# EAGLE board board (EAGLE 4.16)
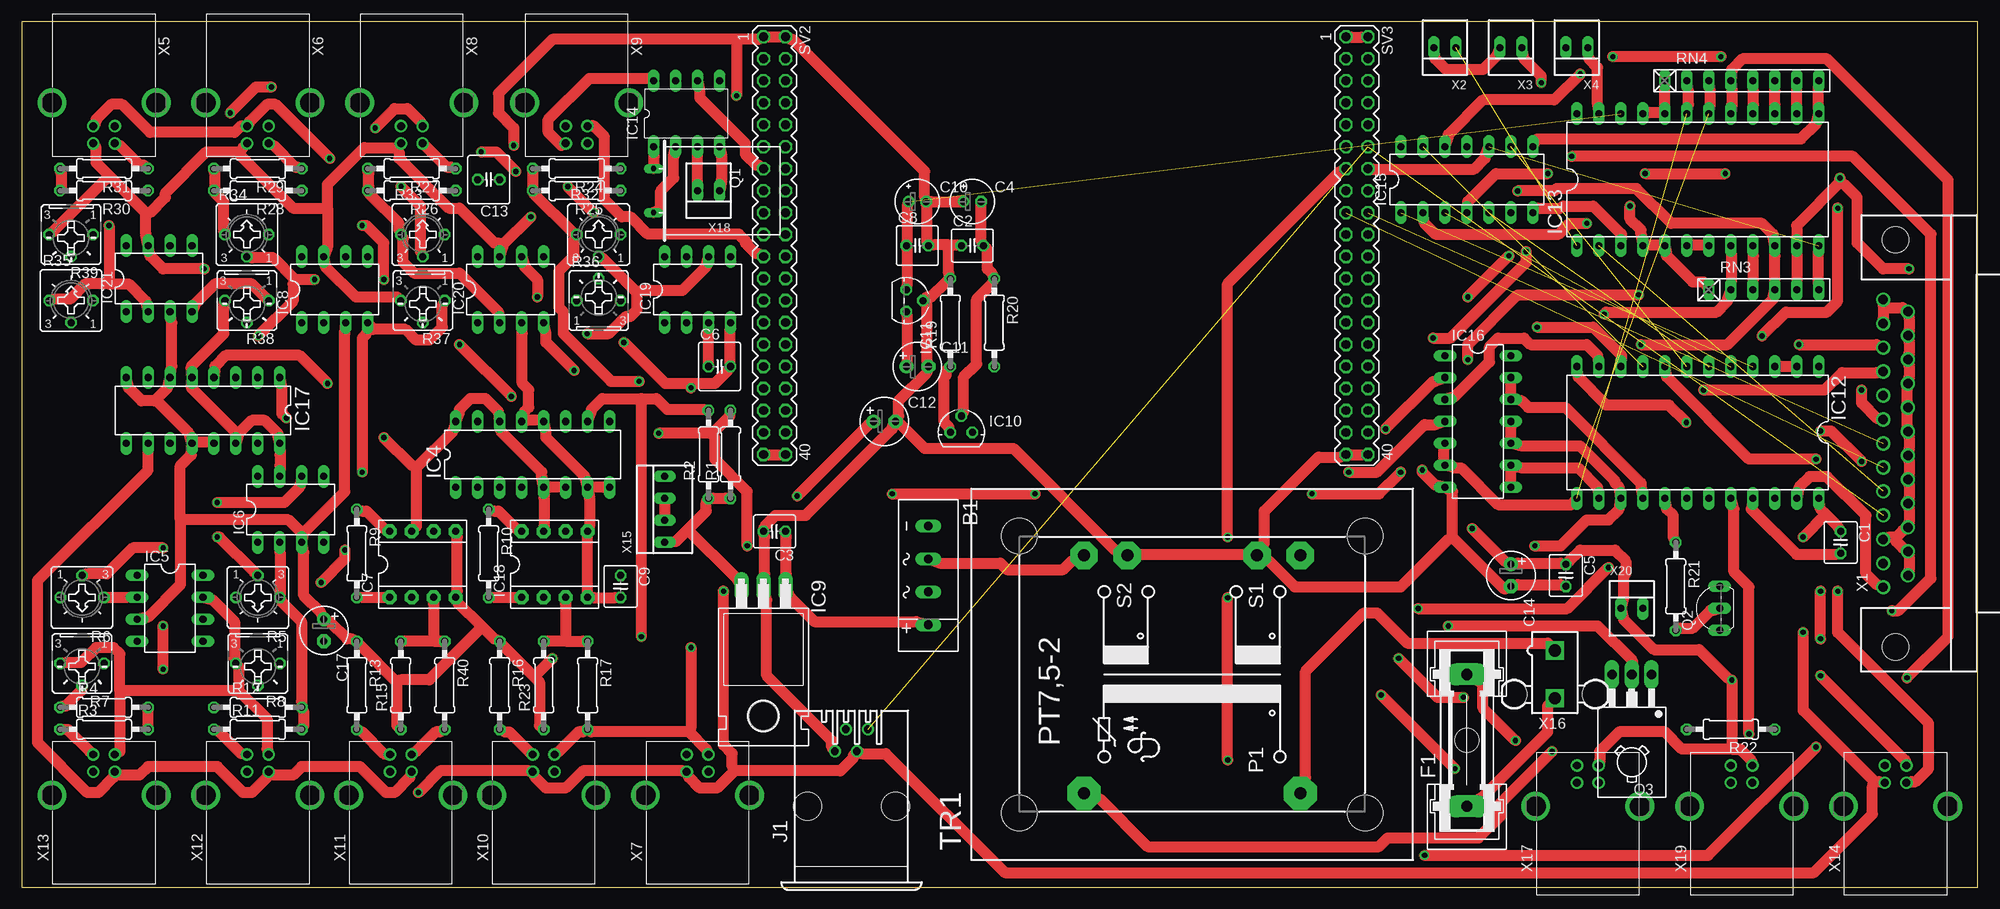
[diagram p0: board, top side]
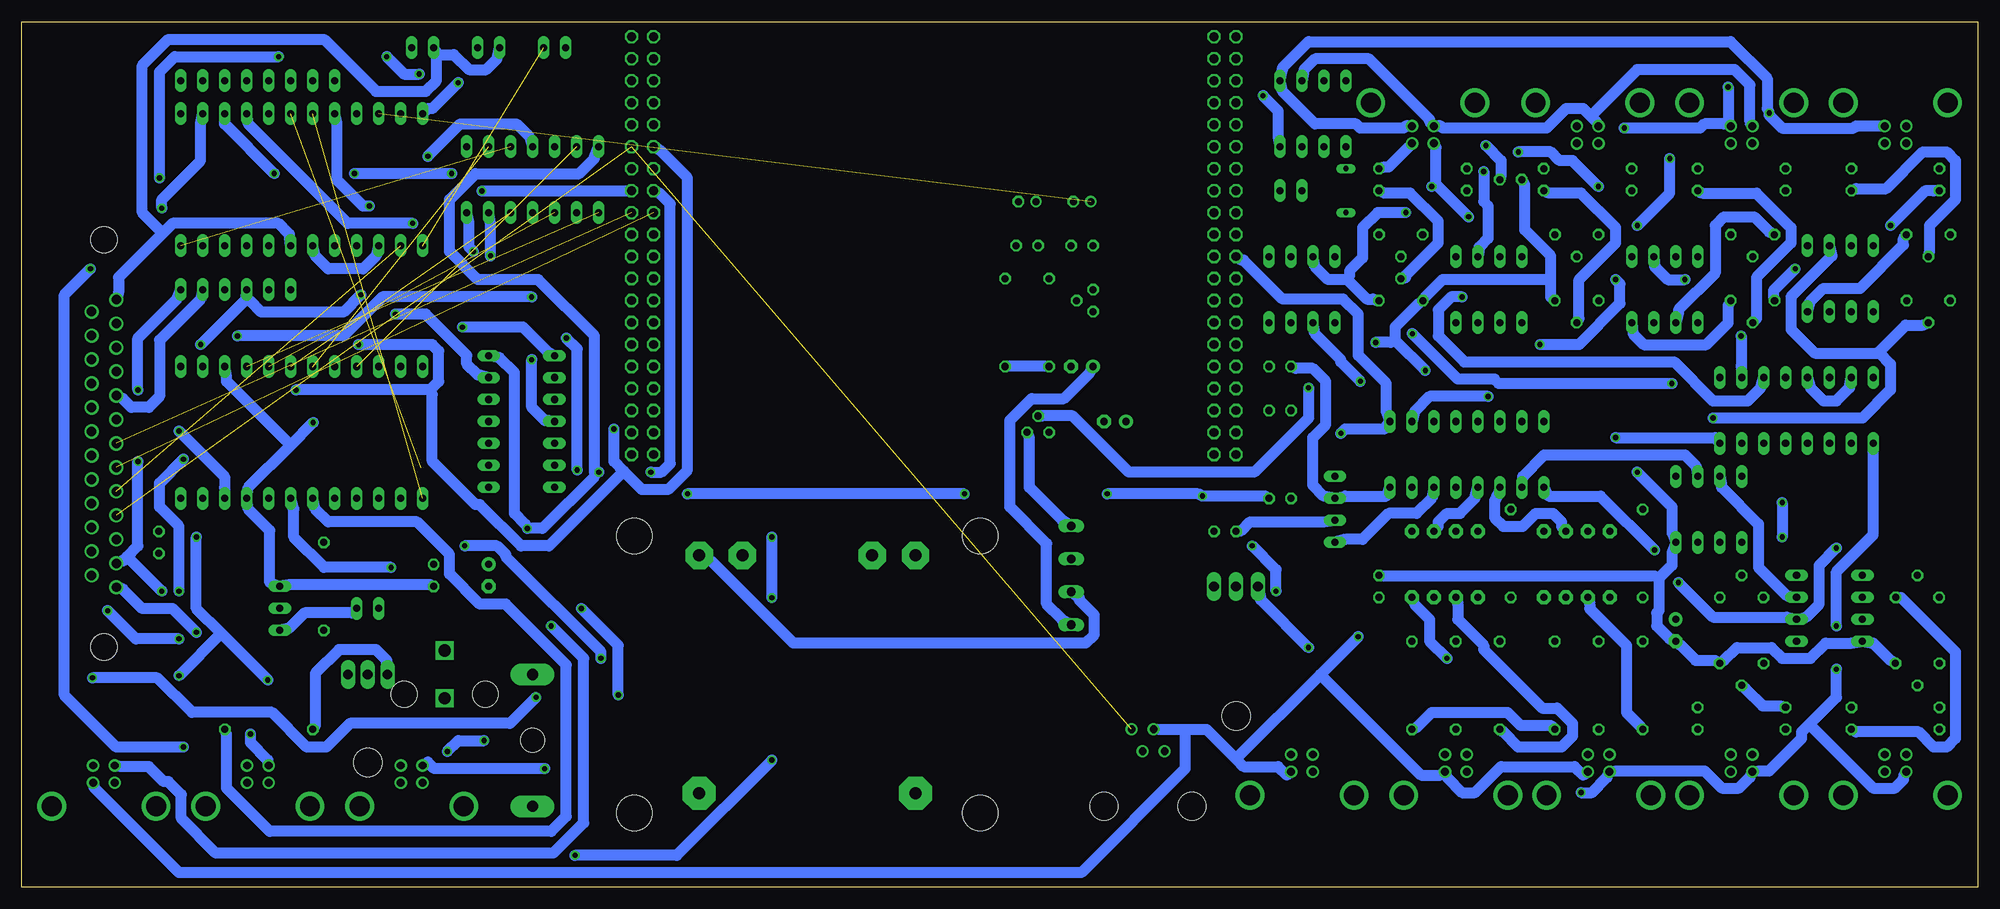
[diagram p1: board, bottom side, seen from below]

Size 226.04 x 100 mm. Coordinates in mm from the lower left corner, seen from the top.
Outline: 0,0 226.04,0 226.04,100 0,100 0,0
Copper layers (1*16): Top 0.035mm / dielectric 1.5mm / Bottom 0.035mm
Design rules "design rules": minimum track width 50mil, minimum drill 24mil, track to track 20mil, track to pad 20mil, pad to pad 20mil, via to via 20mil, smd to smd 20mil, copper to edge 40mil, drill to drill 8mil, minimum pad ring 10mil, minimum via ring 8mil, stop-mask expansion 4mil, vias tented up to drill 0mil, thermal gap 10mil

## Footprints (pad centres in the part's own frame; a part is rotated, then mirrored left to right if it is on the bottom)
2KBP = drill 1.016 long: + 5.715,0; - -5.715,0; AC1 -1.905,0; AC2 1.905,0
C025-040X050 = drill 0.813 octagon: 1 -1.27,0; 2 1.27,0
E2-5 = drill 0.813 pad 1.27 round: + -1.016,0 | drill 0.813 pad 1.27 octagon: - 1.016,0
C025-060X050 = drill 0.813 octagon: 1 -1.27,0; 2 1.27,0
C025-050X050 = drill 0.813 octagon: 1 -1.27,0; 2 1.27,0
E2,5-6 = drill 0.813 pad 1.6 round: + -1.27,0 | drill 0.813 pad 1.6 octagon: - 1.27,0
GSH15 = drill 1.321 pad 2.54 long: 1 -7.62,0; 2 7.62,0 | hole 2.794: 0,0
DIL16 = drill 0.813 long: 1 -8.89,-3.81; 2 -6.35,-3.81; 3 -3.81,-3.81; 4 -1.27,-3.81; 5 1.27,-3.81; 6 3.81,-3.81; 7 6.35,-3.81; 8 8.89,-3.81; 9 8.89,3.81; 10 6.35,3.81; 11 3.81,3.81; 12 1.27,3.81; 13 -1.27,3.81; 14 -3.81,3.81; 15 -6.35,3.81; 16 -8.89,3.81
DIL08 = drill 0.813 long: 1 -3.81,-3.81; 2 -1.27,-3.81; 3 1.27,-3.81; 4 3.81,-3.81; 5 3.81,3.81; 6 1.27,3.81; 7 -1.27,3.81; 8 -3.81,3.81
DIL08' = drill 0.813 pad 1.6 octagon: 1 -3.81,-3.81; 2 -1.27,-3.81; 3 1.27,-3.81; 4 3.81,-3.81; 5 3.81,3.81; 6 1.27,3.81; 7 -1.27,3.81; 8 -3.81,3.81
TO220H = drill 1.118 long: 1 -2.54,-10.16; 2 0,-10.16; 3 2.54,-10.16 | hole 3.302: 0,4.826
337L = drill 0.813 octagon: ADJ -1.27,0; IN 1.27,0; OUT 0,1.905
TO92 = drill 0.813 octagon: 1 -1.27,0; 2 0,1.905; 3 1.27,0
DIL24-6 = drill 0.813 long: 1 -13.97,-7.62; 2 -11.43,-7.62; 3 -8.89,-7.62; 4 -6.35,-7.62; 5 -3.81,-7.62; 6 -1.27,-7.62; 7 1.27,-7.62; 8 3.81,-7.62; 9 6.35,-7.62; 10 8.89,-7.62; 11 11.43,-7.62; 12 13.97,-7.62; 13 13.97,7.62; 14 11.43,7.62; 15 8.89,7.62; 16 6.35,7.62; 17 3.81,7.62; 18 1.27,7.62; 19 -1.27,7.62; 20 -3.81,7.62; 21 -6.35,7.62; 22 -8.89,7.62; 23 -11.43,7.62; 24 -13.97,7.62
DS1307 = drill 0.8 long: 1 -8.89,-5.08; 2 -6.35,-5.08; 3 -3.81,-5.08; 4 -1.27,-5.08; 5 -1.27,2.54; 6 -3.81,2.54; 7 -6.35,2.54; 8 -8.89,2.54
DIL14 = drill 0.813 long: 1 -7.62,-3.81; 2 -5.08,-3.81; 3 -2.54,-3.81; 4 0,-3.81; 5 2.54,-3.81; 6 5.08,-3.81; 7 7.62,-3.81; 8 7.62,3.81; 9 5.08,3.81; 10 2.54,3.81; 11 0,3.81; 12 -2.54,3.81; 13 -5.08,3.81; 14 -7.62,3.81
520242-2 = drill 0.889 round: 1 -1.905,6.35; 2 -0.635,8.89; 3 0.635,6.35; 4 1.905,8.89 | hole 3.251: -5.08,0; 5.08,0
Q = drill 0.61 long: 1 -2.54,-7.62; 2 2.54,-7.62
TO92-EBC = drill 0.813 long: B 0,-1.27; C -2.54,-1.27; E 2.54,-1.27
TO126 = drill 1.118 long: 1 -2.286,-5.08; 2 0,-5.08; 3 2.286,-5.08 | hole 3.302: 0,5.08
0207/10 = drill 0.813 octagon: 1 -5.08,0; 2 5.08,0
CT6 = drill 0.813 octagon: A 2.515,0; E -2.515,0; S 0,-2.54
B25P = drill 0.813 octagon: A -2.54,0; E 2.54,0; S 0,2.54
RN-6 = drill 0.813 long: 1 -6.35,0; 2 -3.81,0; 3 -1.27,0; 4 1.27,0; 5 3.81,0; 6 6.35,0
RN-8 = drill 0.813 long: 1 -8.89,0; 2 -6.35,0; 3 -3.81,0; 4 -1.27,0; 5 1.27,0; 6 3.81,0; 7 6.35,0; 8 8.89,0
MA20-2 = drill 1.016 octagon: 1 -24.13,-1.27; 2 -24.13,1.27; 3 -21.59,-1.27; 4 -21.59,1.27; 5 -19.05,-1.27; 6 -19.05,1.27; 7 -16.51,-1.27; 8 -16.51,1.27; 9 -13.97,-1.27; 10 -13.97,1.27; 11 -11.43,-1.27; 12 -11.43,1.27; 13 -8.89,-1.27; 14 -8.89,1.27; 15 -6.35,-1.27; 16 -6.35,1.27; 17 -3.81,-1.27; 18 -3.81,1.27; 19 -1.27,-1.27; 20 -1.27,1.27; 21 1.27,-1.27; 22 1.27,1.27; 23 3.81,-1.27; 24 3.81,1.27; 25 6.35,-1.27; 26 6.35,1.27; 27 8.89,-1.27; 28 8.89,1.27; 29 11.43,-1.27; 30 11.43,1.27; 31 13.97,-1.27; 32 13.97,1.27; 33 16.51,-1.27; 34 16.51,1.27; 35 19.05,-1.27; 36 19.05,1.27; 37 21.59,-1.27; 38 21.59,1.27; 39 24.13,-1.27; 40 24.13,1.27
PT07,5-2 = drill 1.397 pad 3.81 octagon: 1 -13.741,12.497; 2 -13.741,-12.497 | drill 1.397 pad 3.175 octagon: 3 13.741,-12.497; 4 13.741,-7.493; 5 13.741,7.493; 6 13.741,12.497 | hole 4.115: -16.002,-19.99; 16.002,-19.99; 16.002,19.99; -16.002,19.99
H3M25RA = drill 1.092 round: 1 -16.612,1.422; 2 -13.843,1.422; 3 -11.074,1.422; 4 -8.306,1.422; 5 -5.537,1.422; 6 -2.769,1.422; 7 0,1.422; 8 2.769,1.422; 9 5.537,1.422; 10 8.306,1.422; 11 11.074,1.422; 12 13.843,1.422; 13 16.612,1.422; 14 -15.227,-1.422; 15 -12.459,-1.422; 16 -9.69,-1.422; 17 -6.921,-1.422; 18 -4.153,-1.422; 19 -1.384,-1.422; 20 1.384,-1.422; 21 4.153,-1.422; 22 6.921,-1.422; 23 9.69,-1.422; 24 12.459,-1.422; 25 15.227,-1.422 | hole 3.048: -23.52,0; 23.52,0
22-23-2021 = drill 0.813 long: 1 -1.27,0; 2 1.27,0
85-32004-10X = drill 0.92 pad 1.27 round: 1 4.71,-1.25; 2 4.71,1.25; 3 2.71,1.25; 4 2.71,-1.25 | drill 2.3 pad 3 round: M1 0,6.02; M2 0,-6.02
22-23-2041 = drill 0.813 long: 1 -3.81,0; 2 -1.27,0; 3 1.27,0; 4 3.81,0
5566-2 = drill 1.4 square: 1 0,-2.75; 2 0,2.75 | hole 3: 4.7,2.29; -4.7,2.29

## Placement (x,y rotation side)
B1  [2KBP]  104.77,36.03 270 top
C1  [C025-040X050]  210.18,39.84 270 top
C2  [C025-040X050]  109.85,74.13 0 top
C3  [C025-040X050]  86.99,41.11 180 top
C4  [E2-5]  109.85,79.21 0 top
C5  [C025-040X050]  178.43,36.03 270 top
C6  [C025-060X050]  80.64,60.16 0 top
C8  [C025-050X050]  103.5,74.13 0 top
C9  [C025-040X050]  69.21,34.76 270 top
C10  [E2-5]  103.5,79.21 0 top
C11  [E2,5-6]  103.5,60.16 0 top
C12  [E2,5-6]  99.69,53.81 0 top
C13  [C025-060X050]  53.97,81.75 180 top
C14  [E2,5-6]  172.08,36.03 270 top
C17  [E2,5-6]  34.92,29.68 270 top
F1  [GSH15]  167,16.98 90 top
IC4  PCF8591P  [DIL16]  59.05,50 0 top
IC5  LF351N  [DIL08]  17.14,32.22 270 top
IC6  LF351N  [DIL08]  31.11,43.65 0 top
IC7  INA141P  [DIL08']  46.35,37.3 0 top
IC8  LF351N  [DIL08]  36.19,69.05 0 top
IC9  7805T  [TO220H]  85.72,24.6 180 top
IC10  [337L]  108.58,52.54 0 top
IC11  7812L  [TO92]  102.23,67.78 270 top
IC12  PCA9555N  [DIL24-6]  193.67,52.54 180 top
IC13  MX7225KN  [DIL24-6]  193.67,81.75 0 top
IC14  DS1307  [DS1307]  81.91,90.64 0 top
IC15  74LS07N  [DIL14]  167,81.75 0 top
IC16  74LS07N  [DIL14]  168.27,53.81 270 top
IC17  PCF8591P  [DIL16]  20.95,55.08 180 top
IC18  INA141P  [DIL08']  61.59,37.3 0 top
IC19  LF351N  [DIL08]  78.1,69.05 0 top
IC20  LF351N  [DIL08]  56.51,69.05 0 top
IC21  LF351N  [DIL08]  15.87,70.32 0 top
J1  [520242-2]  95.88,9.36 0 top
Q1  [Q]  80.64,80.48 270 top
Q2  BC548  [TO92-EBC]  194.94,32.22 90 top
Q3  BD236  [TO126]  186.05,19.52 180 top
R1  [0207/10]  81.91,50 90 top
R2  [0207/10]  79.37,50 90 top
R3  [0207/10]  9.52,18.25 0 top
R4  [0207/10]  9.52,20.79 0 top
R5  [CT6]  27.3,33.49 180 top
R6  [CT6]  6.98,33.49 180 top
R7  [B25P]  6.98,25.87 180 top
R8  [B25P]  27.3,25.87 180 top
R9  [0207/10]  38.73,38.57 270 top
R10  [0207/10]  53.97,38.57 270 top
R11  [0207/10]  27.3,18.25 0 top
R12  [0207/10]  27.3,20.79 0 top
R13  [0207/10]  38.73,23.33 270 top
R15  [0207/10]  43.81,23.33 90 top
R16  [0207/10]  55.24,23.33 270 top
R17  [0207/10]  65.4,23.33 270 top
R19  [0207/10]  107.31,65.24 90 top
R20  [0207/10]  112.39,65.24 270 top
R21  [0207/10]  191.13,34.76 270 top
R22  [0207/10]  197.48,18.25 180 top
R23  [0207/10]  60.32,23.33 90 top
R24  [0207/10]  64.13,83.02 180 top
R25  [0207/10]  64.13,80.48 180 top
R26  [0207/10]  45.08,80.48 180 top
R27  [0207/10]  45.08,83.02 180 top
R28  [0207/10]  27.3,80.48 180 top
R29  [0207/10]  27.3,83.02 180 top
R30  [0207/10]  9.52,80.48 180 top
R31  [0207/10]  9.52,83.02 180 top
R32  [CT6]  66.67,75.4 0 top
R33  [CT6]  46.35,75.4 0 top
R34  [CT6]  26.03,75.4 0 top
R35  [CT6]  5.71,67.78 0 top
R36  [B25P]  66.67,67.78 0 top
R37  [B25P]  46.35,67.78 180 top
R38  [B25P]  26.03,67.78 180 top
R39  [B25P]  5.71,75.4 180 top
R40  [0207/10]  48.89,23.33 270 top
RN3  [RN-6]  201.29,69.05 0 top
RN4  [RN-8]  198.75,93.18 0 top
SV2  [MA20-2]  86.99,74.13 270 top
SV3  [MA20-2]  154.3,74.13 270 top
TR1  [PT07,5-2]  135.25,24.6 90 top
X1  D-SUB25-H3M25RA  [H3M25RA]  216.53,51.27 90 top
X2  22-23-2021  [22-23-2021]  164.46,96.99 180 top
X3  22-23-2021  [22-23-2021]  172.08,96.99 180 top
X4  22-23-2021  [22-23-2021]  179.7,96.99 180 top
X5  MINI-USB_SHIELD4P-85-32004-10X  [85-32004-10X]  9.52,90.64 270 top
X6  MINI-USB_SHIELD4P-85-32004-10X  [85-32004-10X]  27.3,90.64 270 top
X7  MINI-USB_SHIELD4P-85-32004-10X  [85-32004-10X]  78.1,10.63 90 top
X8  MINI-USB_SHIELD4P-85-32004-10X  [85-32004-10X]  45.08,90.64 270 top
X9  MINI-USB_SHIELD4P-85-32004-10X  [85-32004-10X]  64.13,90.64 270 top
X10  MINI-USB_SHIELD4P-85-32004-10X  [85-32004-10X]  60.32,10.63 90 top
X11  MINI-USB_SHIELD4P-85-32004-10X  [85-32004-10X]  43.81,10.63 90 top
X12  MINI-USB_SHIELD4P-85-32004-10X  [85-32004-10X]  27.3,10.63 90 top
X13  MINI-USB_SHIELD4P-85-32004-10X  [85-32004-10X]  9.52,10.63 90 top
X14  MINI-USB_SHIELD4P-85-32004-10X  [85-32004-10X]  216.53,9.36 90 top
X15  22-23-2041  [22-23-2041]  74.29,43.65 90 top
X16  5566-2  [5566-2]  177.16,24.6 180 top
X17  MINI-USB_SHIELD4P-85-32004-10X  [85-32004-10X]  180.97,9.36 90 top
X18  22-23-2021  [22-23-2021]  79.37,80.48 180 top
X19  MINI-USB_SHIELD4P-85-32004-10X  [85-32004-10X]  198.75,9.36 90 top
X20  22-23-2021  [22-23-2021]  186.05,32.22 0 top

## Library data of the parts
B1 = rectifier
C1-C6 C8-C14 C17 R1-R4 R9-R13 R15-R17 R19-R31 R40 = rcl
F1 = fuse
IC4 IC12 IC17 = micro-philips
IC5 IC6 IC8 IC9 IC11 IC19-IC21 = linear
IC7 IC18 = burr-brown
IC10 = v-reg
IC13 = maxim
IC14 = aggiunte
IC15 IC16 = 74xx-us
J1 = con-amp
Q1 = special
Q2 = transistor-npn
Q3 = transistor-pnp
R5-R8 R32-R39 = pot
RN3 RN4 = resistor-net
SV2 SV3 = con-lstb
TR1 = trafo
X1 = con-thomas-betts
X2-X4 X15 X16 X18 X20 = con-molex
X5-X14 X17 X19 = con-cypressindustries

## Nets
12V: IC13.4 IC13.5 IC13.20 IC13.21 RN3.1 RN4.1
+5V: C1.1 C5.1 C12.+ C14.+ IC4.5 IC4.6 IC4.14 IC4.16 IC5.7 IC6.7 IC7.7 IC8.7 IC9.3 IC12.24 IC14.8 IC15.14 IC16.14 IC17.5 IC17.7 IC17.14 IC17.16 IC18.7 IC19.7 IC20.7 IC21.7 R1.1 R2.1 R7.E R8.E R17.2 R36.E R37.E R38.E R39.E R40.2 X5.1 X6.1 X7.1 X8.1 X9.1 X10.1 X11.1 X12.1 X13.1 X14.1 X15.1 X17.1 X19.1 X20.1
+12V: C8.1 C10.+ IC11.1 IC13.22
-5V: C2.2 C4.- C6.2 C9.1 C13.2 C17.- IC5.4 IC6.4 IC8.4 IC10.OUT IC19.4 IC20.4 IC21.4 R7.A R8.A R20.1 R36.A R37.A R38.A R39.A
A0: IC12.13 IC13.19 IC16.5 IC16.6 RN4.2
A1: IC12.14 IC13.18 IC16.8 IC16.9 RN4.3
CH0: IC17.1 IC21.6 R35.S
CH1: IC8.6 IC17.2 R34.S
CH2: IC17.3 IC20.6 R33.S
CH3: IC17.4 IC19.6 R32.S
CONTRASTO: IC13.2 X1.5
DATA0: IC13.16 IC15.2 RN4.5
DATA1: IC13.15 IC15.4 RN4.6
DATA2: IC13.14 IC15.6 RN4.7
DATA3: IC13.13 IC15.8 RN4.8
DATA4: IC13.12 IC15.10 RN3.6 SV3.14 X1.8
DATA5: IC13.11 IC15.12 RN3.5 SV3.13 X1.9
DATA6: IC13.10 IC16.2 RN3.4 SV3.11 SV3.16 X1.10
DATA7: IC13.9 IC16.4 RN3.3 SV3.15 X1.11
DB0: IC12.4 IC15.1
DB1: IC12.5 IC15.3
DB2: IC12.6 IC15.5
DB3: IC12.7 IC15.9
DB4: IC12.8 IC15.11
DB5: IC12.9 IC15.13
DB6: IC12.10 IC16.1
DB7: IC12.11 IC16.3
DIM1: IC13.1 X2.1
DIM2: IC13.24 X3.1
DIM3: IC13.23 X4.1
E: SV3.17 X1.6
GND: C1.2 C2.1 C3.2 C4.+ C5.2 C6.1 C8.2 C9.2 C10.- C11.- C12.- C13.1 C14.- C17.+ IC4.7 IC4.8 IC4.12 IC4.13 IC5.3 IC6.3 IC7.4 IC7.5 IC8.3 IC9.2 IC11.2 IC12.2 IC12.3 IC12.12 IC12.21 IC13.3 IC13.6 IC13.7 IC14.4 IC15.7 IC16.7 IC17.6 IC17.8 IC17.12 IC17.13 IC18.4 IC18.5 IC19.3 IC20.3 IC21.3 J1.1 Q2.E R13.1 R15.1 R16.1 R19.2 R23.1 SV2.1 SV2.2 SV3.39 SV3.40 TR1.4 TR1.5 X1.3 X1.12 X1.13 X1.14 X1.15 X1.16 X1.17 X1.18 X1.19 X1.20 X1.21 X1.22 X1.23 X1.24 X1.25 X2.2 X3.2 X4.2 X15.2 X15.3 X18.1
LDAC: IC12.16 IC13.8 IC16.12 IC16.13 RN3.2
N$1: IC12.17 R21.1
N$2: TR1.2 X16.1
N$3: F1.2 TR1.1
N$4: IC7.8 R9.1
N$5: IC7.1 R9.2
N$6: IC18.8 R10.1
N$7: IC18.1 R10.2
N$8: IC12.19 X17.2
N$9: IC4.1 IC5.6 R6.S
N$10: IC4.2 IC6.6 R5.S
N$11: IC12.20 X19.2
N$13: IC4.3 IC7.6
N$22: IC4.4 IC18.6
N$26: Q2.B R21.2
N$27: Q2.C X20.2
N$31: R8.S R12.1
N$35: B1.AC1 TR1.6
N$40: Q3.3 R22.2
N$42: Q3.1
N$51: IC12.18 R22.1
N$58: IC5.2 R3.2 R4.2 R6.E
N$60: R3.1 X13.2
N$61: Q3.2 X14.2
N$62: R4.1 R7.S
N$63: IC6.2 R5.E R11.2 R12.2
N$66: IC7.3 R15.2 R40.1
N$67: B1.- IC10.IN
N$68: IC7.2 R13.2 X11.2
N$69: R11.1 X12.2
N$70: SV3.1 SV3.2
N$71: SV2.39 SV2.40
N$74: IC14.3 X18.2
N$76: B1.+ C3.1 C11.+ IC9.1 IC11.3
N$77: IC10.ADJ R19.1 R20.2
N$80: B1.AC2 TR1.3
N$83: IC14.1 Q1.1
N$84: IC14.2 Q1.2
N$85: F1.1 X16.2
N$107: IC18.3 R17.1 R23.2
N$110: IC18.2 R16.2 X10.2
N$113: IC19.2 R24.2 R25.2 R32.E
N$114: IC20.2 R26.2 R27.2 R33.E
N$115: IC8.2 R28.2 R29.2 R34.E
N$116: IC21.2 R30.2 R31.2 R35.E
N$117: R31.1 X5.2
N$119: R29.1 X6.2
N$121: R30.1 R39.S
N$122: R28.1 R38.S
N$123: R26.1 R37.S
N$124: R27.1 X8.2
N$125: R24.1 X9.2
N$126: R25.1 R36.S
RS: SV3.18 X1.7
SCL: IC4.10 IC12.22 IC14.6 IC17.10 J1.2 R2.2 SV2.13 X1.2 X5.4 X6.4 X7.4 X8.4 X9.4 X10.4 X11.4 X12.4 X13.4 X14.4
SDA: IC4.9 IC12.23 IC14.5 IC17.9 J1.3 R1.2 SV2.21 X1.1 X5.3 X6.3 X7.3 X8.3 X9.3 X10.3 X11.3 X12.3 X13.3 X14.3
VCC: J1.4 SV3.12 X1.4
WR: IC12.15 IC13.17 IC16.10 IC16.11 RN4.4

## Tracks (layer width: path | path; a pad name or v marks a point on that pad's centre or on a via)
12V  (via drill 0.61)
  Top 1.27: IC13.21 187.85,89.45 189.35,89.45 IC13.20 189.85,90.45 189.85,91.95 RN4.1 | RN3.1 194.35,69.95 193.1,69.95 190.1,72.95 IC13.5 189.35,74.2 187.85,74.2 IC13.4 187.1,75.45 187.1,75.95 185.85,77.2 v185.85,78.7
  Bottom 1.27: v185.85,78.7 186.6,78.7 189.6,81.7 189.6,88.2 IC13.20
+5V  (via drill 0.61)
  Top 1.27: 208.47,43.08 209.85,41.7 C1.1 | 208.47,43.08 207.85,43.7 IC12.24 | 197.6,15.95 198.6,15.95 199.85,14.7 X19.1 | 197.6,15.95 191.85,15.95 189.85,17.95 184.6,17.95 182.35,15.7 182.35,14.7 X17.1 | v205.85,40.45 208.47,43.08 | 197.6,15.95 v197.6,23.95 197.1,24.2 193.85,27.45 188.6,27.45 185.1,30.95 X20.1 185.1,33.45 185.1,35.95 185.35,36.2 185.35,37.7 184.1,38.95 180.1,38.95 178.85,37.7 C5.1 177.85,37.45 172.85,37.45 C14.+ 171.35,37.7 v167.6,41.45 | R40.2 48.35,17.95 47.85,17.95 45.6,15.7 X11.1 | X10.1 62.1,15.7 64.35,17.95 64.85,17.95 R17.2 65.85,17.95 77.1,17.95 | 77.1,17.95 79.1,15.95 X7.1 | IC4.5 60.85,46.2 62.35,46.2 IC4.6 | IC18.7 60.35,41.7 60.35,44.95 IC4.5 | 45.6,48.45 45.6,41.7 IC7.7 | 45.6,48.45 49.85,52.7 IC4.16 50.6,54.95 50.6,55.2 51.85,56.45 53.6,56.45 55.1,54.95 IC4.14 55.35,52.7 60.1,47.95 60.1,47.45 IC4.5 | 76.97,41.33 79.1,43.45 79.1,44.45 R2.1 79.85,44.95 81.35,44.95 R1.1 | 76.97,41.33 75.6,39.95 X15.1 | IC9.3 82.35,35.95 76.97,41.33 | v77.35,27.7 77.35,18.45 77.1,17.95 | 55.6,74.2 55.6,73.95 IC20.7 | 55.6,74.2 v58.85,77.45 | 11.35,22.7 11.35,15.7 X13.1 | 11.35,22.7 11.35,26.95 10.6,27.7 8.6,27.7 6.85,25.95 5.1,25.95 R7.E | IC5.7 22.1,33.2 24.6,30.7 24.6,26.45 R8.E 25.1,25.45 25.1,22.7 | 25.1,22.7 28.35,19.45 28.35,15.95 X12.1 | 25.1,22.7 11.35,22.7 | 25.1,52.45 26.6,53.95 28.1,53.95 29.6,52.45 IC17.16 29.85,49.95 29.85,48.7 IC6.7 | 25.1,52.45 IC17.14 | R38.E 23.35,67.2 23.35,63.95 19.6,60.2 IC17.5 19.6,57.7 24.6,52.7 25.1,52.45 | R37.E 43.35,68.2 38.6,68.2 35.1,71.7 IC8.7 35.35,73.95 35.35,78.45 | 43.35,85.45 39.6,85.45 35.35,81.2 35.35,78.45 | 43.35,85.45 X8.1
  Top 1.27: 14.35,77.95 14.35,75.45 IC21.7 14.85,72.95 16.35,71.45 v21.1,71.45 | 10.1,82.2 8.6,83.7 8.6,85.45 X5.1 | 14.35,77.95 10.1,82.2 | R39.E 3.6,75.7 10.1,82.2 | 25.1,84.95 25.6,85.45 X6.1 | 25.1,84.95 21.35,84.95 16.6,80.2 16.6,79.7 14.85,77.95 14.35,77.95 | 35.35,78.45 31.35,78.45 25.35,84.45 25.1,84.95 | 55.6,74.2 55.1,74.45 54.6,74.45 50.6,78.45 49.35,78.45 43.6,84.2 43.6,84.95 43.35,85.45 | v41.85,51.95 45.1,48.7 45.6,48.45 | IC14.8 72.6,93.45 65.6,93.45 60.85,88.7 60.85,87.2 62.35,85.7 X9.1 | v63.1,80.95 v66.1,77.95 | v207.85,24.45 217.6,14.7 X14.1 | v89.6,45.2 97.85,53.45 C12.+ | v100.6,45.45 v117.1,45.45 | v149.1,45.45 156.85,45.45 v159.35,47.95
  Bottom 1.27: v205.85,40.45 205.85,32.2 202.97,29.32 | v197.6,23.95 202.97,29.32 | R40.2 49.35,18.7 52.85,18.7 54.35,20.2 63.1,20.2 64.85,18.45 R17.2 | IC4.6 63.1,44.95 64.85,43.2 68.1,43.2 71.1,40.2 73.1,40.2 X15.1 | v77.35,27.7 82.85,33.2 IC9.3 | 72.85,70.2 70.6,67.95 69.85,67.95 R36.E | 72.85,70.2 75.1,70.2 76.6,71.7 IC19.7 | v58.85,77.45 62.6,81.2 | 62.6,81.2 62.6,85.45 X9.1 | IC17.7 14.85,57.7 16.35,56.2 17.85,56.2 19.35,57.7 IC17.5 | v21.1,71.45 23.6,68.95 23.6,68.2 R38.E | IC5.7 22.1,33.7 25.35,36.95 25.35,41.95 29.6,46.2 IC6.7 | v41.85,51.95 30.35,51.95 IC17.16 | v66.1,77.95 69.35,77.95 71.1,76.2 71.1,72.7 72.6,71.2 72.6,70.7 72.85,70.2 | 62.6,81.2 v63.1,80.95 | 202.97,29.32 v207.85,24.45 | R1.1 82.35,45.2 v89.6,45.2 90.1,45.45 v100.6,45.45 | 159.85,47.95 159.85,47.45 165.85,41.45 v167.6,41.45 167.85,41.95 169.1,43.2 169.1,59.45 170.85,61.2 IC16.14 | 159.85,47.95 159.85,63.7 166.35,70.2 173.35,70.2 176.6,73.45 176.6,79.45 173.6,82.45 161.6,82.45 159.85,84.2 159.85,84.45 IC15.14 | v117.1,45.45 v149.1,45.45 | v159.35,47.95 159.85,47.95
+12V  (1 unrouted)
  Top 1.27: IC11.1 102.35,69.7 102.35,73.7 C8.1 102.35,74.7 102.35,78.7 C10.+
-5V  (via drill 0.61)
  Top 1.27: IC21.4 20.1,67.45 22.35,69.7 26.6,69.7 28.1,68.2 R38.A | R37.A 48.6,67.2 48.6,64.7 47.1,63.2 45.6,63.2 44.35,64.45 40.6,64.45 IC8.4 39.85,63.95 39.35,63.45 v39.35,47.95 | IC10.OUT 108.85,54.95 108.85,58.95 110.35,60.45 110.35,67.95 112.1,69.7 R20.1 112.1,70.95 111.6,71.45 111.6,73.7 C2.2 110.85,74.7 110.85,78.7 C4.- | IC19.4 81.85,63.95 81.85,60.7 C6.2 81.6,59.7 80.1,58.2 77.35,58.2 | v63.85,59.7 60.6,62.95 60.6,63.95 IC20.4 | 77.35,58.2 74.35,58.2 v69.6,62.95 | 77.35,58.2 v77.35,57.7
  Bottom 1.27: R7.A 10.1,26.2 12.1,28.2 IC5.4 14.6,28.2 17.6,28.2 19.35,26.45 22.6,26.45 23.85,27.7 27.85,27.7 29.35,26.2 R8.A 30.35,26.2 32.6,26.2 34.35,27.95 C17.- 35.6,28.7 37.1,30.2 37.1,31.7 36.85,31.95 36.85,35.7 | 36.85,35.7 35.35,37.2 35.35,38.7 IC6.4 35.35,40.95 35.35,43.95 v39.35,47.95 | C9.1 68.6,35.95 37.35,35.95 36.85,35.7 | R39.A 8.6,74.95 8.6,74.2 13.6,69.2 17.85,69.2 19.35,67.7 IC21.4 | 49.35,70.2 49.35,68.2 R37.A | 49.35,70.2 49.35,72.95 52.35,75.95 52.35,81.2 C13.2 | R38.A 28.85,67.2 28.85,65.2 31.35,62.7 38.6,62.7 39.85,63.95 IC8.4 | 67.35,63.2 v63.85,59.7 | 67.35,63.2 67.35,64.7 64.6,67.45 R36.A 63.85,68.2 61.85,70.2 49.35,70.2 | v69.6,62.95 67.85,62.95 67.35,63.2 | v77.35,57.7 77.35,54.2 83.6,47.95 98.1,47.95 104.6,54.45 108.1,54.45 IC10.OUT
A0  (1 unrouted)
  Top 1.27: IC16.5 164.35,50.7 164.35,49.2 IC16.6 165.6,48.45 166.35,48.45 170.6,44.2 179.1,44.2 IC12.13 | IC13.19 192.6,90.45 192.6,91.95 RN4.2
A1  (1 unrouted)
  Top 1.27: IC16.8 172.1,46.7 172.1,48.2 IC16.9 173.35,48.45 179.85,48.45 182.1,46.2 IC12.14 | IC13.18 195.1,90.45 195.1,91.95 RN4.3
CH0  (via drill 0.61)
  Top 1.27: v30.6,54.2 30.1,54.7 30.1,57.7 IC17.1
  Bottom 1.27: 11.47,61.83 11.6,61.7 18.85,61.7 21.6,64.45 21.6,68.2 16.85,72.95 IC21.6 | 11.47,61.83 8.35,64.95 6.35,64.95 R35.S | v30.6,54.2 13.35,54.2 10.1,57.45 10.1,60.45 11.47,61.83
CH1  (via drill 0.61)
  Top 1.27: 31.6,70.2 29.1,72.7 26.6,72.7 R34.S | v33.85,70.2 31.6,70.2 | v27.35,63.7 31.35,67.7 31.35,69.7 31.6,70.2
  Bottom 1.27: v33.85,70.2 35.85,70.2 37.35,71.7 IC8.6 | v27.35,63.7 27.35,60.2 IC17.2
CH2  (via drill 0.61)
  Top 1.27: v59.6,68.2 59.6,70.2 58.1,71.7 IC20.6 | v43.85,80.95 46.1,78.7 46.1,73.45 R33.S | v53.1,84.95 54.85,84.95 v57.1,82.7
  Bottom 1.27: v59.6,68.2 60.85,68.2 62.35,66.7 62.35,63.7 59.35,60.7 35.1,60.7 30.6,56.2 26.6,56.2 25.1,57.7 IC17.3 | v43.85,80.95 46.85,83.95 48.35,83.95 49.35,84.95 v53.1,84.95 | v57.1,82.7 57.1,79.2 56.6,78.7 56.6,74.95 57.6,73.95 IC20.6
CH3  (via drill 0.61)
  Top 1.27: v35.35,58.2 32.1,61.45 23.6,61.45 22.35,60.2 IC17.4 | v65.35,63.95 67.85,63.95 69.85,65.95 70.35,65.95 71.1,66.7 71.1,68.7 | 71.1,68.7 67.1,72.7 R32.S | IC19.6 79.1,71.7 76.35,68.95 71.6,68.95 71.1,68.7
  Bottom 1.27: v35.35,58.2 55.35,58.2 55.85,58.7 60.1,58.7 v65.35,63.95
CONTRASTO  (1 unrouted)
DATA0  (via drill 0.61)
  Top 1.27: v180.85,76.7 178.85,76.7 177.6,75.45 163.35,75.45 162.1,76.7 IC15.2 | RN4.5 200.1,91.95 200.1,90.45 IC13.16
  Bottom 1.27: v180.85,76.7 188.35,76.7 199.85,88.2 IC13.16
DATA1  (via drill 0.61)
  Top 1.27: v176.35,82.45 170.35,82.45 167.1,79.2 IC15.4 | v187.6,82.45 v196.85,82.45 | RN4.6 202.6,91.95 202.6,90.45 IC13.15
  Bottom 1.27: v176.35,82.45 v187.6,82.45 | v196.85,82.45 202.6,88.2 IC13.15
DATA2  (via drill 0.61)
  Top 1.27: v167.1,68.2 v171.85,72.95 | v201.1,63.7 203.85,66.45 208.6,66.45 209.85,67.7 v209.85,78.45 | IC13.14 RN4.7
  Bottom 1.27: v171.85,72.95 171.85,76.7 IC15.6 | v167.1,68.2 184.35,68.2 188.85,63.7 v201.1,63.7 | v209.85,78.45 209.85,79.45 205.35,83.95 205.35,88.2 IC13.14
DATA3
  Top 1.27: IC15.8 175.1,86.45 205.6,86.45 207.35,88.2 IC13.13 207.6,90.45 207.6,91.95 RN4.8
DATA4  (via drill 0.61)  (1 unrouted)
  Top 1.27: RN3.6 207.6,70.2 207.6,72.95 IC13.12 | v212.6,57.45 212.6,55.95 214.35,54.2 X1.8 | IC15.10 169.1,84.45 169.1,84.2 167.85,82.95 156.1,82.95 SV3.14
  Bottom 1.27: v212.6,57.45 212.6,63.45 208.1,67.95 RN3.6
DATA5  (via drill 0.61)
  Top 1.27: v180.1,93.95 177.1,90.95 168.85,90.95 164.85,86.95 164.85,86.7 IC15.12 | v196.35,95.95 v183.85,95.95 | 210.1,81.45 v210.1,81.95 | 210.1,81.45 205.1,76.45 IC13.11 RN3.5 | v139.35,40.45 139.35,69.7 152.35,82.7 SV3.13 | v139.35,14.7 v139.35,33.45 | v162.1,3.7 194.85,3.7 v207.35,16.2 | v218.1,71.45 215.1,71.45 212.1,74.45 212.1,79.7 210.6,81.2 210.1,81.45
  Bottom 1.27: v180.1,93.95 181.85,93.95 v183.85,95.95 | v196.35,95.95 208.35,95.95 210.1,94.2 v210.1,81.95 | v139.35,33.45 v139.35,40.45 | v139.35,14.7 150.35,3.7 v162.1,3.7 | v207.35,16.2 215.1,16.2 221.1,22.2 221.1,68.45 v218.1,71.45 | X1.9 214.35,56.45 213.35,55.45 211.35,55.45 210.1,56.7 210.1,63.2 205.35,67.95 RN3.5
DATA6  (via drill 0.61)
  Top 1.27: v157.6,52.95 163.1,58.45 163.35,58.45 IC16.2 | v172.85,80.45 177.1,80.45 177.35,80.7 186.6,80.7 190.6,76.7 201.1,76.7 202.35,75.45 IC13.10 202.6,72.95 202.6,70.2 RN3.4 202.35,67.95 197.1,62.7 v187.1,62.7 | v194.35,57.45 208.35,57.45 210.35,59.45 214.35,59.45 X1.10
  Bottom 1.27: v157.6,52.95 157.6,49.2 156.47,48.08 | 156.47,48.08 154.35,45.95 151.35,45.95 149.1,48.2 149.1,81.95 152.35,85.2 SV3.11 | v172.85,80.45 156.1,80.45 SV3.16 | 178.85,57.45 v194.35,57.45 | 178.85,57.45 177.85,58.45 177.85,61.95 178.6,62.7 v187.1,62.7 | 156.47,48.08 165.1,39.45 168.35,39.45 173.1,44.2 173.6,44.2 178.6,49.2 178.6,56.95 178.85,57.45
DATA7  (via drill 0.61)
  Top 1.27: RN3.3 200.1,70.2 200.1,72.95 IC13.9 | v205.35,62.7 214.35,62.7 X1.11 | v153.35,47.95 156.6,47.95 162.1,53.45 163.35,53.45 IC16.4 | v186.85,68.45 172.85,68.45 167.1,62.7 v167.1,60.95
  Bottom 1.27: 200.1,67.95 v205.35,62.7 | 200.1,67.95 RN3.3 | v153.35,47.95 152.1,47.95 151.1,48.95 151.1,78.95 152.35,80.2 SV3.15 | v186.85,68.45 188.85,66.45 198.35,66.45 199.6,67.7 200.1,67.95 | v167.1,60.95 167.1,55.45 165.6,53.95 IC16.4
DB0  (1 unrouted)
DB1  (1 unrouted)
DB2  (1 unrouted)
DB3  (1 unrouted)
DB4  (via drill 0.61)
  Top 1.27: v207.35,49.45 199.6,49.45 190.1,58.95 IC12.8 | v207.85,28.7 v207.85,34.2 | v216.1,31.95 216.85,31.95 220.6,35.7 220.6,75.45 211.6,84.45 v179.1,84.45
  Bottom 1.27: v207.35,49.45 210.1,46.7 210.1,43.95 207.85,41.7 v207.85,34.2 | v207.85,28.7 212.85,28.7 v216.1,31.95 | v179.1,84.45 175.35,88.2 168.85,88.2 167.35,86.7 IC15.11
DB5  (1 unrouted)
DB6  (via drill 0.61)
  Top 1.27: v175.1,64.7 181.6,64.7 184.85,61.45 IC12.10
  Bottom 1.27: v175.1,64.7 168.1,64.7 165.35,61.95 IC16.1
DB7
  Top 1.27: IC16.3 165.6,56.7 169.6,60.7 169.6,62.45 170.6,63.45 173.6,63.45 174.35,62.7 180.85,62.7 182.1,61.45 IC12.11
DIM1  (1 unrouted)
DIM2  (via drill 0.61)
  Top 1.27: v175.6,92.95 175.6,93.7 173.6,95.7 X3.1
  Bottom 1.27: v175.6,92.95 178.6,89.95 179.1,89.95 IC13.24
DIM3
  Top 1.27: IC13.23 182.1,90.45 182.1,94.7 181.1,95.7 X4.1
E  (1 unrouted)
GND  (via drill 0.61)
  Top 1.27: IC12.3 203.1,60.2 204.6,60.2 IC12.2 | X1.13 215.1,67.2 | X1.14 218.1,36.7 218.1,38.2 X1.15 217.35,39.2 216.6,39.95 216.6,40.45 | 216.6,40.45 215.85,40.45 X1.3 | 216.6,40.45 217.35,41.2 X1.16 218.1,42.2 218.1,43.7 X1.17 218.1,44.95 218.1,46.45 X1.18 218.1,47.7 218.1,49.2 X1.19 218.1,50.7 218.1,51.95 X1.20 217.85,53.45 217.85,54.7 X1.21 217.85,56.2 217.85,57.45 X1.22 218.1,58.95 218.1,60.2 X1.23 218.1,61.7 218.1,62.95 X1.24 218.1,64.45 218.1,65.7 X1.25 217.35,66.95 215.6,66.95 215.1,67.2 | SV3.40 154.85,49.95 153.6,49.95 SV3.39 152.35,49.7 149.85,49.7 143.6,43.45 143.6,39.7 TR1.4 | TR1.4 141.35,38.45 129.1,38.45 TR1.5 126.35,38.95 114.6,50.7 104.35,50.7 101.6,53.45 C12.- | C5.2 177.85,34.95 172.85,34.95 C14.- 171.35,34.45 165.35,40.45 | 165.35,40.45 165.35,45.7 IC16.7 163.35,46.45 161.85,47.95 v161.85,48.2 | v192.35,53.7 190.35,55.7 183.1,55.7 179.85,58.95 IC12.12 | C1.2 209.6,38.45 205.1,38.45 199.85,43.7 IC12.21 | TR1.4 144.1,37.7 147.1,34.7 159.35,34.7 164.85,40.2 165.35,40.45 | 15.35,56.2 13.85,56.2 12.35,57.7 IC17.8 | 15.35,56.2 16.85,57.7 IC17.6 17.35,60.2 17.35,65.2 IC21.3 | 18.35,42.45 18.35,48.7 19.6,49.95 IC17.12 | 18.35,42.45 18.35,34.95 14.6,31.2 IC5.3 | IC17.13 21.6,51.45 20.1,51.45 IC17.12 | 15.35,56.2 15.85,55.95 19.35,52.45 IC17.12 | 53.22,30.07 50.35,32.95 IC7.4 50.35,34.2 50.35,40.45 IC7.5 | 53.22,30.07 54.6,28.7 R16.1 55.6,27.95 59.22,24.32 | 59.22,24.32 59.85,23.7 59.85,18.7 R23.1 | 43.35,23.7 43.35,18.7 R15.1 | 43.35,23.7 39.1,27.95 R13.1 38.1,28.7 37.6,28.7 35.6,30.7 C17.+ 34.6,31.7 32.6,33.7 32.6,38.7 IC6.3 32.6,40.95 | 32.6,40.95 37.35,45.7 37.35,63.95 IC8.3
  Top 1.27: 53.22,30.07 47.1,23.95 43.85,23.95 43.35,23.7 | 18.35,42.45 30.85,42.45 32.1,41.2 32.6,40.95 | IC20.3 57.85,63.95 57.85,58.2 58.6,57.45 58.6,55.45 58.1,54.95 IC4.13 58.35,53.95 59.85,53.95 IC4.12 60.6,52.7 60.6,51.95 65.1,47.45 IC4.7 | C6.1 79.35,60.7 79.35,63.95 IC19.3 | C9.2 68.6,33.45 66.1,33.45 IC18.4 65.35,34.2 65.35,40.45 IC18.5 65.6,41.7 65.6,44.95 IC4.7 | X15.2 74.35,42.95 74.35,44.45 X15.3 | IC4.7 65.85,46.2 67.35,46.2 IC4.8 | C12.- 101.35,54.45 101.35,56.2 104.6,59.45 C11.- 104.6,60.95 104.6,67.45 IC11.2 104.6,68.2 105.1,68.2 106.85,69.95 R19.2 107.1,70.95 107.1,74.2 | C10.- 105.1,79.2 108.35,79.2 C4.+ | 107.1,74.2 108.1,74.2 C2.1 | 107.1,74.2 105.35,74.2 C8.2 104.6,74.7 104.6,78.7 C10.- | J1.1 93.6,16.2 93.6,16.95 86.1,24.45 86.1,33.2 IC9.2 85.85,36.2 85.85,40.45 C3.2 85.85,41.7 87.1,42.95 90.6,42.95 100.6,52.95 100.6,53.2 C12.- | C10.- 104.35,79.7 104.35,82.7 89.1,97.95 88.85,97.95 SV2.2 87.6,98.2 86.35,98.2 SV2.1 85.1,97.95 82.6,97.95 | v61.35,26.45 59.22,24.32 | IC14.4 80.85,84.45 80.85,81.7 X18.1 | v56.85,85.7 56.85,87.7 55.1,89.45 55.1,91.7 61.35,97.95 82.6,97.95 | 82.6,97.95 v82.6,91.45 | X2.2 163.35,95.7 164.6,94.45 168.85,94.45 170.35,95.95 X3.2 | X1.12 215.1,65.7 215.1,67.2 | IC13.7 194.35,74.2 192.85,74.2 IC13.6 | IC15.7 175.1,78.45 177.85,78.45 178.1,78.7 181.6,78.7 184.85,75.45 IC13.3 | v173.85,73.45 173.85,72.2 165.1,63.45 v163.1,63.45
  Bottom 1.27: 194.97,51.08 199.85,46.2 IC12.21 199.85,43.7 197.35,41.2 197.35,35.2 Q2.E 195.1,34.95 178.85,34.95 C5.2 | 194.97,51.08 v192.35,53.7 | IC12.3 202.35,58.95 202.35,58.45 194.97,51.08 | IC4.8 68.35,45.2 73.1,45.2 X15.3 75.6,45.2 76.85,46.45 76.85,51.95 75.35,53.45 75.35,58.45 76.85,59.95 78.85,59.95 C6.1 | X15.2 75.6,42.2 84.1,42.2 85.1,41.2 C3.2 | v61.35,26.45 63.35,28.45 63.35,30.95 65.1,32.7 IC18.4 | v56.85,85.7 55.1,83.95 55.1,82.2 C13.1 | v82.6,91.45 80.85,89.7 80.85,86.7 IC14.4 | 177.85,96.2 176.1,96.2 174.35,94.45 172.35,94.45 171.1,95.7 X3.2 | 177.85,96.2 X4.2 | IC13.3 185.1,72.95 186.6,71.45 190.6,71.45 192.1,72.95 IC13.6 | 209.72,75.58 208.6,76.7 196.35,76.7 195.1,75.45 IC13.7 | 209.72,75.58 214.85,70.45 214.85,68.7 X1.13 | 177.85,96.2 178.1,95.7 178.1,93.2 179.35,91.95 185.1,91.95 191.1,97.95 209.1,97.95 212.1,94.95 212.1,77.95 209.72,75.58 | v173.85,73.45 174.35,73.95 174.35,76.7 IC15.7 | v163.1,63.45 161.85,62.2 v161.85,48.2
LDAC  (via drill 0.61)
  Top 1.27: IC16.13 172.1,58.45 172.1,56.95 IC16.12 173.35,56.2 174.1,55.45 178.35,55.45 187.1,46.7 187.1,46.2 IC12.16 | IC13.8 197.6,72.95 197.6,70.2 RN3.2 197.1,67.95 197.1,67.7 195.85,66.45 183.1,66.45 v182.85,66.2
  Bottom 1.27: v182.85,66.2 179.35,66.2 174.6,61.45 174.6,60.45 173.35,59.2 IC16.13
N$1
  Top 1.27: R21.1 190.85,40.45 190.85,42.95 190.1,43.7 IC12.17
N$2
  Top 1.27: X16.1 176.35,28.2 160.1,28.2 156.6,31.7 155.1,31.7 148.35,24.95 148.35,12.7 TR1.2
N$3  (via drill 0.61)
  Top 1.27: v172.6,16.95 168.85,20.7 168.85,23.45 F1.2 | v176.85,15.7 170.85,9.7 170.85,8.2 168.35,5.7 157.85,5.7 156.85,4.7 130.1,4.7 124.6,10.2 TR1.1
  Bottom 1.27: v172.6,16.95 175.6,16.95 v176.85,15.7
N$4
  Top 1.27: R9.1 39.35,43.45 39.85,43.45 41.85,41.45 IC7.8
N$5
  Top 1.27: R9.2 39.35,33.45 41.85,33.45 IC7.1
N$6
  Top 1.27: R10.1 54.6,43.45 55.1,43.45 57.1,41.45 IC18.8
N$7
  Top 1.27: R10.2 54.6,33.45 57.1,33.45 IC18.1
N$8  (via drill 0.61)
  Top 1.27: v183.35,36.95 178.6,32.2 v161.35,32.2 | v165.6,13.7 v157.1,22.2
  Bottom 1.27: v183.35,36.95 191.1,36.95 194.6,40.45 194.6,43.7 IC12.19 | v161.35,32.2 157.1,27.95 v157.1,22.2 | v165.6,13.7 178.35,13.7 179.1,14.45 X17.2
N$9  (via drill 0.61)
  Top 1.27: v16.35,39.2 12.85,39.2 9.85,36.2 7.6,36.2 R6.S | v37.35,38.95 37.35,37.95 v34.6,35.2
  Bottom 1.27: v16.35,39.2 18.35,37.2 18.35,32.7 19.85,31.2 IC5.6 22.1,31.2 30.6,31.2 v34.6,35.2 | v37.35,38.95 43.6,45.2 49.6,45.2 IC4.1
N$10  (via drill 0.61)
  Top 1.27: v22.6,40.45 22.85,40.45 26.85,36.45 R5.S | v22.6,44.45 30.35,44.45 32.1,46.2 IC6.6
  Bottom 1.27: v22.6,44.45 v22.6,40.45 | IC4.2 52.6,47.45 50.1,49.95 33.85,49.95 32.6,48.7 IC6.6
N$11  (via drill 0.61)
  Top 1.27: v199.6,17.7 199.6,34.7 197.85,36.45 197.85,43.7 IC12.20
  Bottom 1.27: v199.6,17.7 199.6,16.7 197.6,14.7 X19.2
N$13
  Bottom 1.27: IC4.3 55.6,45.2 55.6,44.95 55.85,44.7 55.85,42.7 54.85,41.7 52.6,41.7 51.1,43.2 49.1,43.2 48.1,42.2 48.1,41.7 IC7.6
N$22
  Bottom 1.27: IC4.4 58.1,44.95 59.85,43.2 61.35,43.2 62.35,42.2 62.35,41.7 IC18.6
N$26
  Top 1.27: R21.2 191.6,29.95 193.1,29.95 195.1,31.95 Q2.B
N$27
  Bottom 1.27: X20.2 187.85,31.7 193.35,31.7 195.1,29.95 Q2.C
N$31
  Bottom 1.27: R12.1 22.85,20.95 24.85,20.95 26.85,22.95 R8.S
N$35
  Top 1.27: B1.AC1 106.1,37.45 113.1,37.45 113.85,36.7 120.35,36.7 121.35,37.7 TR1.6
N$40
  Bottom 1.27: R22.2 192.1,18.7 192.1,24.7 189.35,27.45 185.1,27.45 183.85,26.2 Q3.3
N$51
  Bottom 1.27: R22.1 202.35,17.7 202.35,11.45 197.35,6.45 164.85,6.45 163.1,8.2 163.1,25.7 170.1,32.7 173.1,32.7 176.6,36.2 176.6,38.45 180.35,42.2 190.6,42.2 192.1,43.7 IC12.18
N$58
  Top 1.27: R3.2 R4.2 | R6.E 10.1,33.45 12.1,33.45 IC5.2
  Bottom 1.27: R3.2 14.1,17.95 6.85,17.95 5.1,16.2 3.6,16.2 2.6,17.2 2.6,27.2 8.85,33.45 R6.E
N$60
  Top 1.27: R3.1 5.1,18.2 5.35,18.2 7.85,15.7 X13.2
N$61  (via drill 0.61)
  Top 1.27: v164.85,30.2 182.1,30.2 186.1,26.2 Q3.2
  Bottom 1.27: v164.85,30.2 161.1,26.45 161.1,7.45 164.6,3.95 203.6,3.95 207.6,7.95 207.6,10.7 209.1,12.2 209.6,12.2 211.35,13.95 214.6,13.95 X14.2
N$62
  Top 1.27: R4.1 5.1,20.95 6.85,22.7 R7.S
N$63
  Top 1.27: R11.2 32.6,18.7 32.6,20.2 R12.2 32.35,21.45 32.35,30.7 30.1,32.95 R5.E 29.85,33.95 29.85,38.7 IC6.2
N$66
  Top 1.27: 47.6,28.45 48.35,28.45 R40.1 | 47.6,28.45 44.35,28.45 R15.2 | IC7.3 47.6,32.7 47.6,28.45
N$67
  Bottom 1.27: IC10.IN 109.6,51.95 109.6,46.2 105.85,42.45 B1.-
N$68
  Top 1.27: R13.2 39.35,17.95 41.85,15.45 X11.2
  Bottom 1.27: IC7.2 44.85,32.7 44.85,32.2 40.6,27.95 40.6,20.2 39.1,18.7 R13.2
N$69
  Top 1.27: R11.1 22.85,17.95 25.35,15.45 X12.2
N$70
  Top 1.27: SV3.1 153.6,98.2 154.85,98.2 SV3.2
N$71
  Top 1.27: SV2.39 86.35,49.95 87.6,49.95 SV2.40
N$74
  Top 1.27: X18.2 IC14.3
N$76
  Top 1.27: IC11.3 102.35,65.95 102.35,60.95 C11.+ | C3.1 88.35,40.45 88.35,36.2 IC9.1 88.85,33.45 91.6,30.7 103.35,30.7 B1.+
  Bottom 1.27: C11.+ 102.6,59.45 105.6,56.45 109.35,56.45 111.85,53.95 111.85,43.95 107.6,39.7 107.6,32.7 105.85,30.95 B1.+
N$77
  Top 1.27: IC10.ADJ 107.1,53.2 106.6,53.7 106.6,58.95 106.85,59.2 106.85,59.7 R19.1
  Bottom 1.27: R20.2 111.85,60.2 107.85,60.2 R19.1
N$80
  Bottom 1.27: B1.AC2 103.85,33.45 103.85,33.2 102.1,31.45 102.1,29.2 103.1,28.2 136.85,28.2 146.35,37.7 TR1.3
N$83
  Top 1.27: Q1.1 73.1,83.45 73.1,84.45 IC14.1
N$84
  Top 1.27: Q1.2 73.85,78.45 73.85,80.45 75.35,81.95 75.35,84.45 IC14.2
N$85
  Top 1.27: X16.2 176.35,20.95 176.35,17.95 168.85,10.45 F1.1
N$107
  Top 1.27: 62.85,28.45 64.85,28.45 R17.1 | 62.85,28.45 60.85,28.45 R23.2 | IC18.3 62.85,32.7 62.85,28.45
N$110
  Top 1.27: R16.2 55.85,17.95 56.35,17.95 58.6,15.7 X10.2
  Bottom 1.27: IC18.2 60.1,32.7 60.1,30.95 57.1,27.95 57.1,27.45 50.35,20.7 48.6,20.7 46.85,18.95 46.85,17.45 48.1,16.2 53.1,16.2 54.85,17.95 R16.2
N$113  (via drill 0.61)
  Top 1.27: R24.2 59.1,82.45 59.1,80.95 R25.2 59.35,79.95 63.6,75.7 R32.E 63.85,74.95 63.85,72.95 62.1,71.2 62.1,66.95 62.6,66.45 62.6,63.95 68.1,58.45 v71.35,58.45
  Bottom 1.27: v71.35,58.45 73.6,60.7 73.6,60.95 76.6,63.95 IC19.2
N$114
  Top 1.27: IC20.2 55.1,66.45 50.6,70.95 45.35,70.95 44.1,72.2 44.1,74.95 R33.E 43.6,75.95 43.6,76.7 40.35,79.95 R26.2 40.1,80.95 40.1,82.45 R27.2
N$115
  Top 1.27: R29.2 22.35,82.45 22.35,80.95 R28.2 22.6,79.95 23.35,79.2 23.35,75.95 R34.E
  Bottom 1.27: IC8.2 34.6,66.45 34.6,66.7 30.35,70.95 30.35,76.45 29.35,77.45 25.85,77.45 24.1,75.7 R34.E
N$116  (via drill 0.61)
  Top 1.27: R30.2 4.6,80.95 4.6,82.45 R31.2 | 10.1,69.7 12.35,69.7 14.35,67.7 IC21.2 | 10.1,69.7 7.35,69.7 5.6,67.95 3.85,67.95 R35.E | v10.1,76.45 10.1,69.7
  Bottom 1.27: v10.1,76.45 6.1,80.45 5.1,80.45 R30.2
N$117
  Top 1.27: R31.1 14.1,83.45 13.6,83.45 11.35,85.7 X5.2
N$119
  Top 1.27: R29.1 31.85,83.2 31.6,83.2 29.1,85.7 X6.2
N$121
  Bottom 1.27: R39.S 5.6,73.45 5.6,76.45 2.6,79.45 2.6,83.95 3.6,84.95 6.35,84.95 10.6,80.7 14.1,80.7 R30.1
N$122
  Bottom 1.27: R38.S 25.6,65.7 25.6,70.45 21.6,74.45 21.6,76.2 25.6,80.2 31.85,80.2 R28.1
N$123
  Bottom 1.27: R37.S 46.1,65.7 46.1,70.2 41.85,74.45 41.85,76.2 45.85,80.2 49.6,80.2 R26.1
N$124
  Top 1.27: R27.1 49.6,83.2 49.1,83.2 46.85,85.45 X8.2
N$125
  Bottom 1.27: R24.1 68.6,83.2 68.1,83.2 65.85,85.45 X9.2
N$126
  Bottom 1.27: R36.S 66.1,70.45 66.1,70.7 62.35,74.45 62.35,76.95 65.6,80.2 68.6,80.2 R25.1
RS  (1 unrouted)
SCL  (via drill 0.61)
  Top 1.27: X5.4 8.6,88.45 8.6,88.7 10.35,90.45 11.6,90.45 14.85,87.2 24.6,87.2 25.35,87.95 X6.4 26.35,88.45 28.35,90.45 29.35,90.45 v35.6,84.2 | v207.85,52.7 209.1,52.7 v212.6,49.2 | v209.85,34.2 209.85,29.45 220.35,18.95 220.35,13.7 218.85,12.2 218.35,12.2 X14.4 | IC17.10 14.6,48.2 1.85,35.45 1.85,16.7 7.6,10.95 8.85,10.95 10.6,12.7 X13.4 11.35,12.95 13.6,12.95 14.6,13.95 22.6,13.95 25.6,10.95 26.6,10.95 28.35,12.7 X12.4 29.1,12.95 31.35,12.95 32.35,13.95 39.1,13.95 42.1,10.95 43.1,10.95 44.85,12.7 X11.4 | 71.6,56.45 73.35,56.45 74.6,55.2 78.85,55.2 R2.2 | 71.6,56.45 67.1,56.45 65.85,55.2 65.85,54.95 IC4.10 | 71.6,56.45 v71.6,28.95 | v39.35,76.45 39.85,76.45 41.85,74.45 v41.85,70.2 | v50.6,62.7 v56.6,56.7 | IC14.6 78.35,91.95 78.35,91.2 83.6,85.95 83.6,84.7 84.85,83.45 85.1,83.45 SV2.13
  Bottom 1.27: v207.85,52.7 202.6,47.45 202.6,46.2 IC12.22 | v212.6,49.2 212.6,39.45 213.85,38.2 | 213.85,38.2 214.35,37.7 X1.2 | v209.85,34.2 213.85,38.2 | X11.4 45.6,12.95 46.6,13.95 55.1,13.95 58.1,10.95 59.6,10.95 61.35,12.7 X10.4 62.1,12.95 64.35,12.95 75.97,24.57 | 91.6,18.2 89.1,18.2 85.72,14.82 | 91.6,18.2 94.6,18.2 J1.2 | 85.72,14.82 84.85,13.95 80.85,13.95 79.85,12.95 X7.4 | v71.6,28.95 75.97,24.57 | 75.97,24.57 85.72,14.82 | X14.4 217.6,11.45 207.85,1.7 103.6,1.7 91.6,13.7 91.6,18.2 | v35.6,84.2 35.6,80.2 v39.35,76.45 | v41.85,70.2 41.35,69.7 41.35,67.45 46.1,62.7 v50.6,62.7 | v56.6,56.7 63.35,56.7 65.1,54.95 IC4.10 | 44.72,89.08 45.6,89.95 47.6,89.95 49.85,87.7 61.85,87.7 62.1,87.95 62.35,87.95 X9.4 63.35,88.45 63.35,88.7 70.35,95.7 76.6,95.7 77.85,94.45 IC14.6 | 44.72,89.08 44.1,88.45 X8.4 | 44.72,89.08 39.35,94.45 28.1,94.45 26.35,92.7 26.35,88.45 X6.4
SDA  (via drill 0.61)
  Top 1.27: v24.1,89.45 27.1,92.45 v28.85,92.45 | v40.85,87.7 43.1,89.95 44.6,89.95 46.1,88.45 X8.3 | v16.35,25.2 v16.35,30.2 | IC12.23 205.35,46.2 206.6,47.45 208.6,47.45 213.1,42.95 213.1,36.2 214.35,34.95 X1.1 | 214.1,12.2 214.6,12.2 X14.3 | 214.1,12.2 205.85,20.45 v205.85,29.45 | 79.85,52.45 v73.6,52.45 | 79.85,52.45 81.85,54.45 R1.2 | 82.35,13.45 94.6,13.45 96.1,14.95 96.1,15.2 J1.3 97.1,15.45 99.85,15.45 113.6,1.7 207.1,1.7 213.85,8.45 213.85,11.7 214.1,12.2 | 82.35,13.45 80.35,11.45 78.35,11.45 77.1,12.7 X7.3 76.35,13.45 64.85,13.45 62.85,11.45 60.6,11.45 59.35,12.7 X10.3 58.6,13.45 48.35,13.45 v45.85,10.95 | v83.85,39.45 83.85,45.7 80.1,49.45 80.1,51.95 79.85,52.45 | v81.1,34.2 81.1,16.45 82.1,15.45 82.1,13.95 82.35,13.45 | X9.3 65.85,87.95 66.1,87.95 67.35,86.7 67.35,79.45 69.35,77.45 70.35,77.45 72.35,75.45 82.85,75.45 83.6,74.7 83.6,74.45 83.85,74.45 83.85,74.2 84.85,73.2 85.1,73.2 SV2.21
  Bottom 1.27: v28.85,92.45 28.85,88.45 | X5.3 11.35,87.95 14.1,87.95 14.35,87.7 22.6,87.7 24.1,89.2 v24.1,89.45 24.35,89.95 24.35,93.45 28.6,97.7 77.35,97.7 80.35,94.7 80.35,94.45 IC14.5 80.35,91.95 76.6,88.2 71.85,88.2 71.35,87.7 66.35,87.7 66.1,87.95 65.85,87.95 X9.3 | 28.85,88.45 X6.3 | v40.85,87.7 32.1,87.7 31.6,88.2 29.35,88.2 28.85,88.45 | v16.35,30.2 16.35,36.45 12.1,40.7 12.1,49.95 IC17.9 | v16.35,25.2 16.35,21.95 19.47,18.82 | 19.47,18.82 20.35,17.95 20.35,17.2 24.1,13.45 25.35,13.45 X12.3 26.35,12.7 27.6,11.45 29.6,11.45 31.6,13.45 41.85,13.45 X11.3 42.85,12.7 44.6,10.95 v45.85,10.95 | X13.3 8.6,12.7 8.6,12.45 9.6,11.45 12.1,11.45 19.47,18.82 | v205.85,29.45 208.6,32.2 212.1,32.2 214.35,34.45 X1.1 | v73.6,52.45 73.1,52.95 68.6,52.95 IC4.9 68.35,54.95 68.35,58.2 71.6,61.45 71.6,66.2 73.35,67.95 80.35,67.95 84.85,72.45 85.1,72.45 SV2.21 | v83.85,39.45 81.1,36.7 v81.1,34.2
VCC  (2 unrouted)
WR  (via drill 0.61)
  Top 1.27: IC16.11 172.1,53.2 172.1,51.7 IC16.10 173.35,50.95 180.1,50.95 184.1,46.95 184.1,46.7 184.6,46.2 IC12.15 184.6,43.7 183.35,42.45 180.85,42.45 177.85,39.45 v174.85,39.45 | IC13.17 197.6,90.45 197.6,91.95 RN4.4 197.6,94.45 198.85,95.7 208.6,95.7 222.6,81.7 222.6,28.95 v217.85,24.2 | v166.6,21.95 163.6,21.95 v159.1,26.45
  Bottom 1.27: v217.85,24.2 210.35,24.2 206.35,20.2 197.1,20.2 193.1,16.2 190.85,16.2 188.1,18.95 169.6,18.95 v166.6,21.95 | v159.1,26.45 159.1,27.2 170.1,38.2 170.1,38.45 171.1,39.45 v174.85,39.45